# Altium PCB cyberlamp.PcbDoc (part 1 of 2)
Units mm, origin at the board's own origin, x right, y up, seen from the top; angles counter-clockwise.
Board outline 100 x 80 mm, 2 copper layers (Top Layer, Bottom Layer), stack 1.371 mm thick; 155 components, 110 nets, 527 pads, 165 vias.
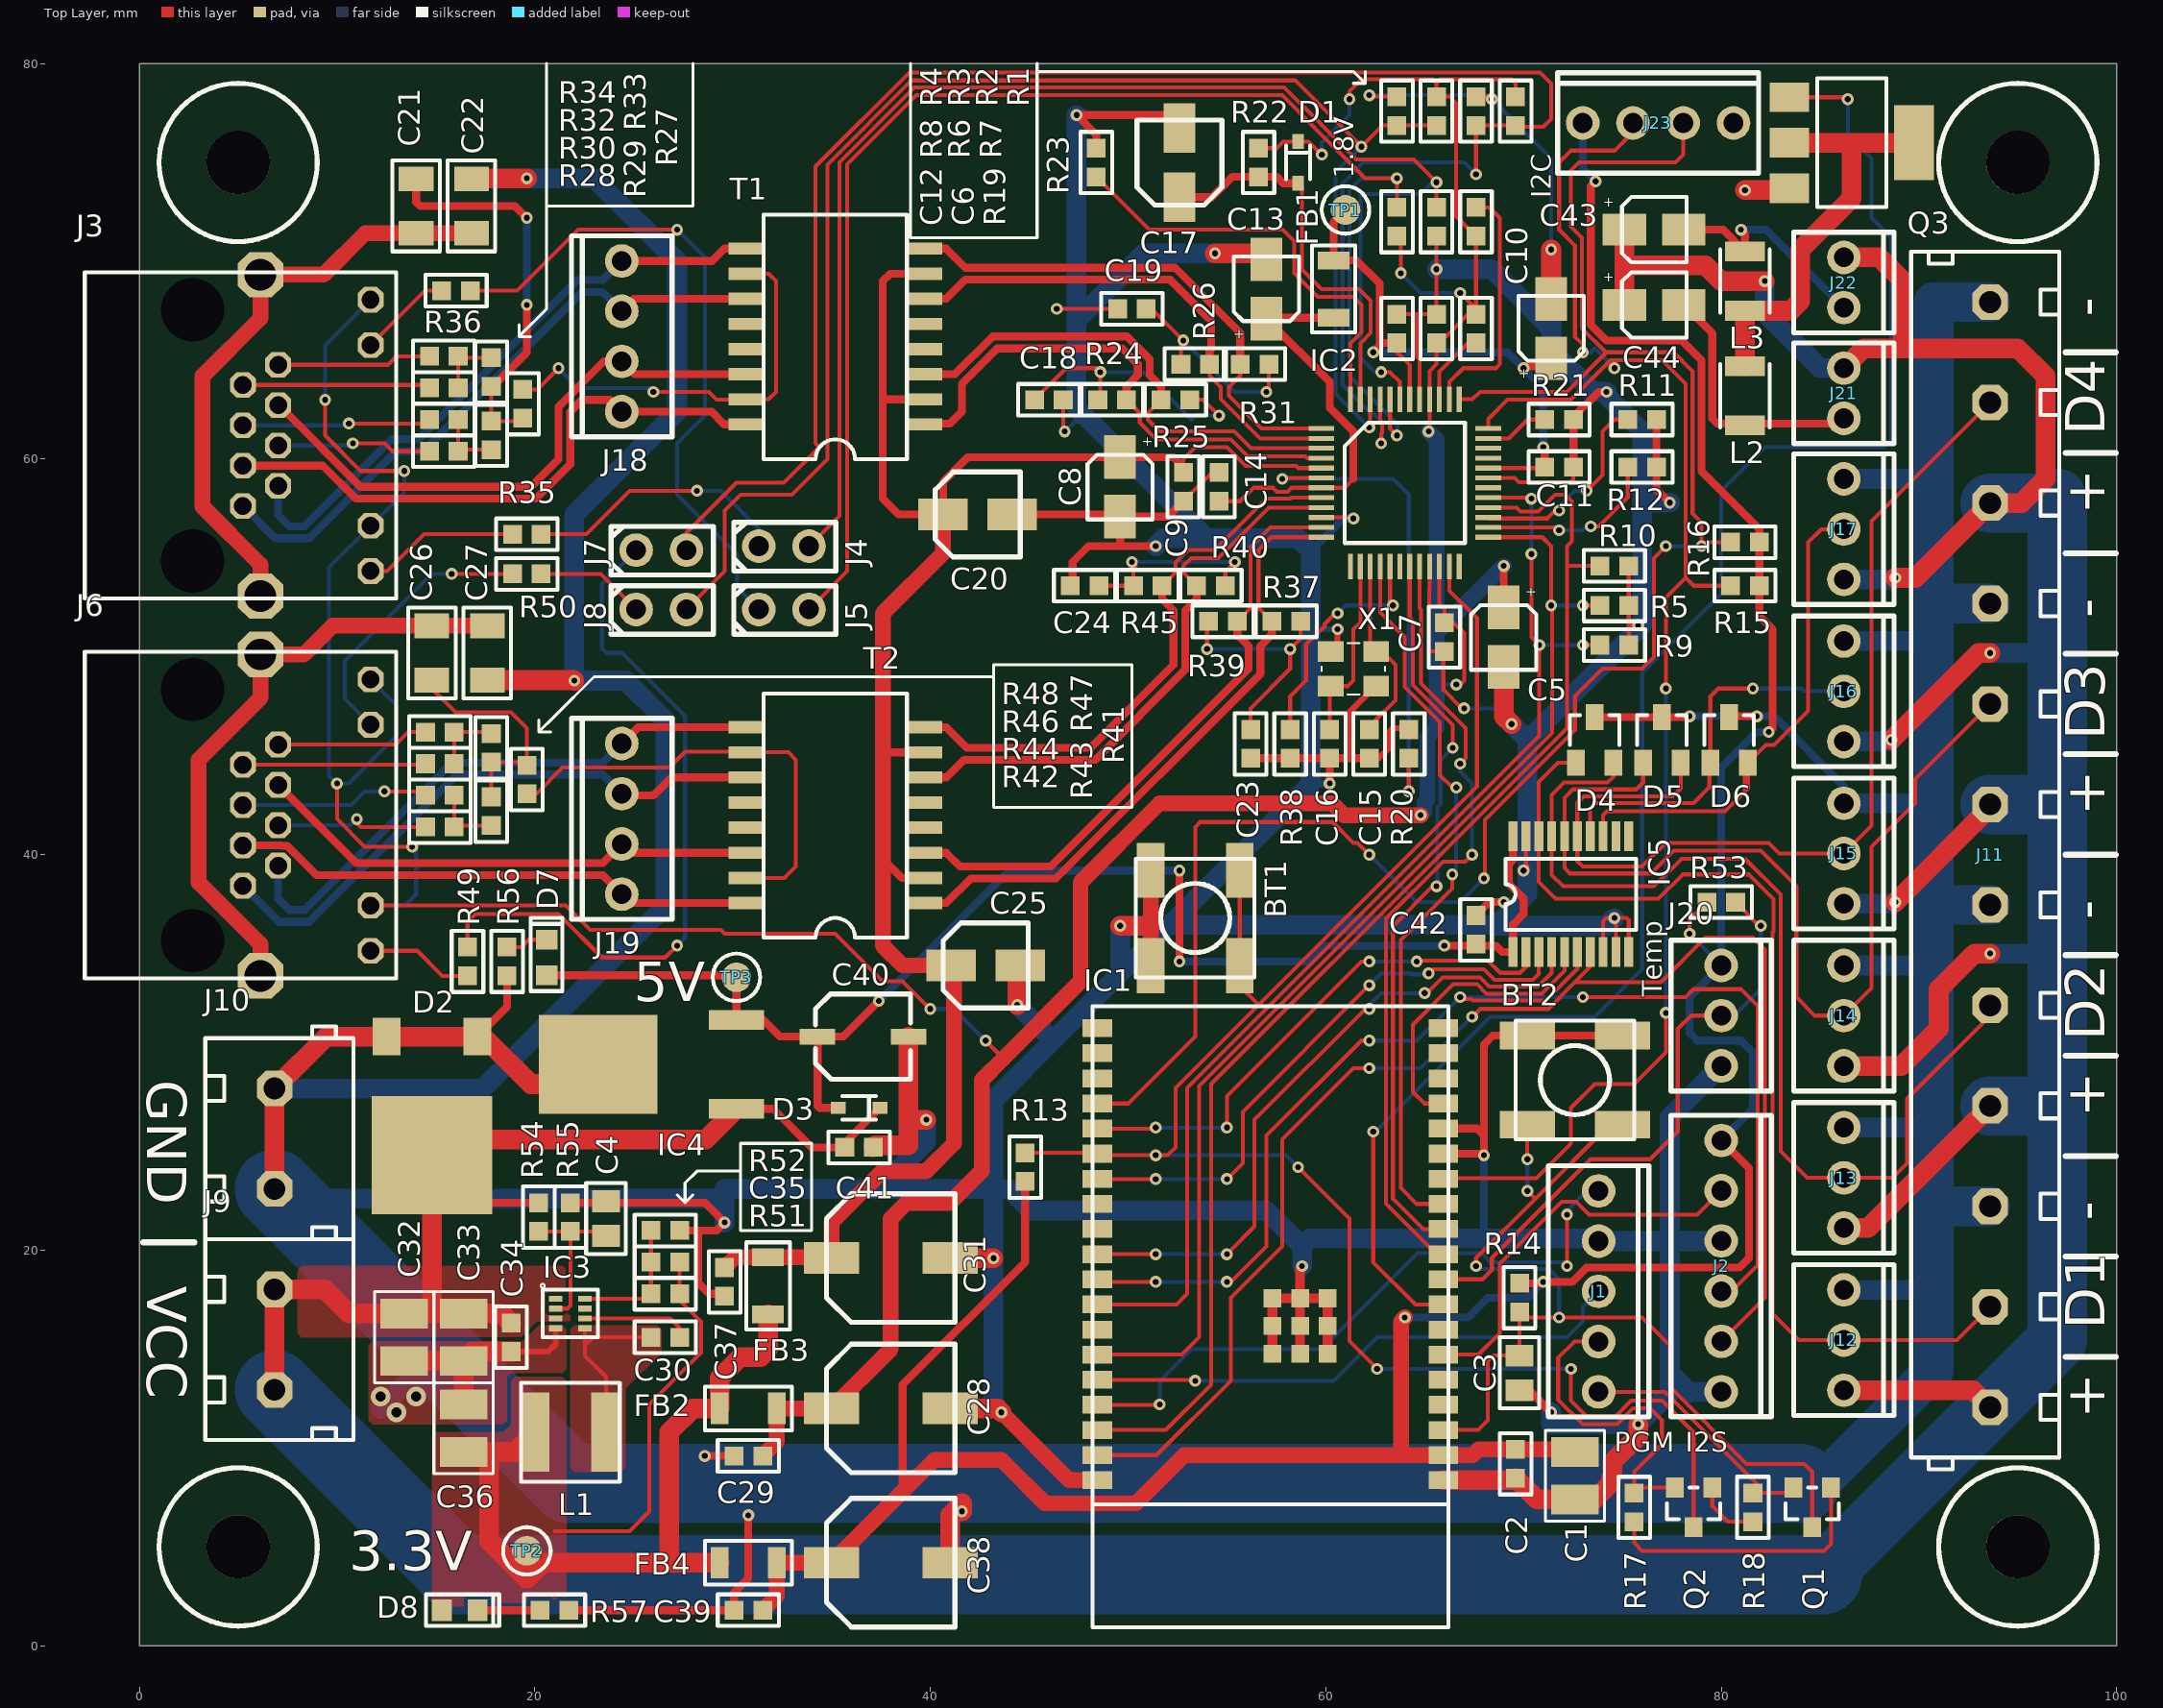
[diagram p0: Top Layer view]
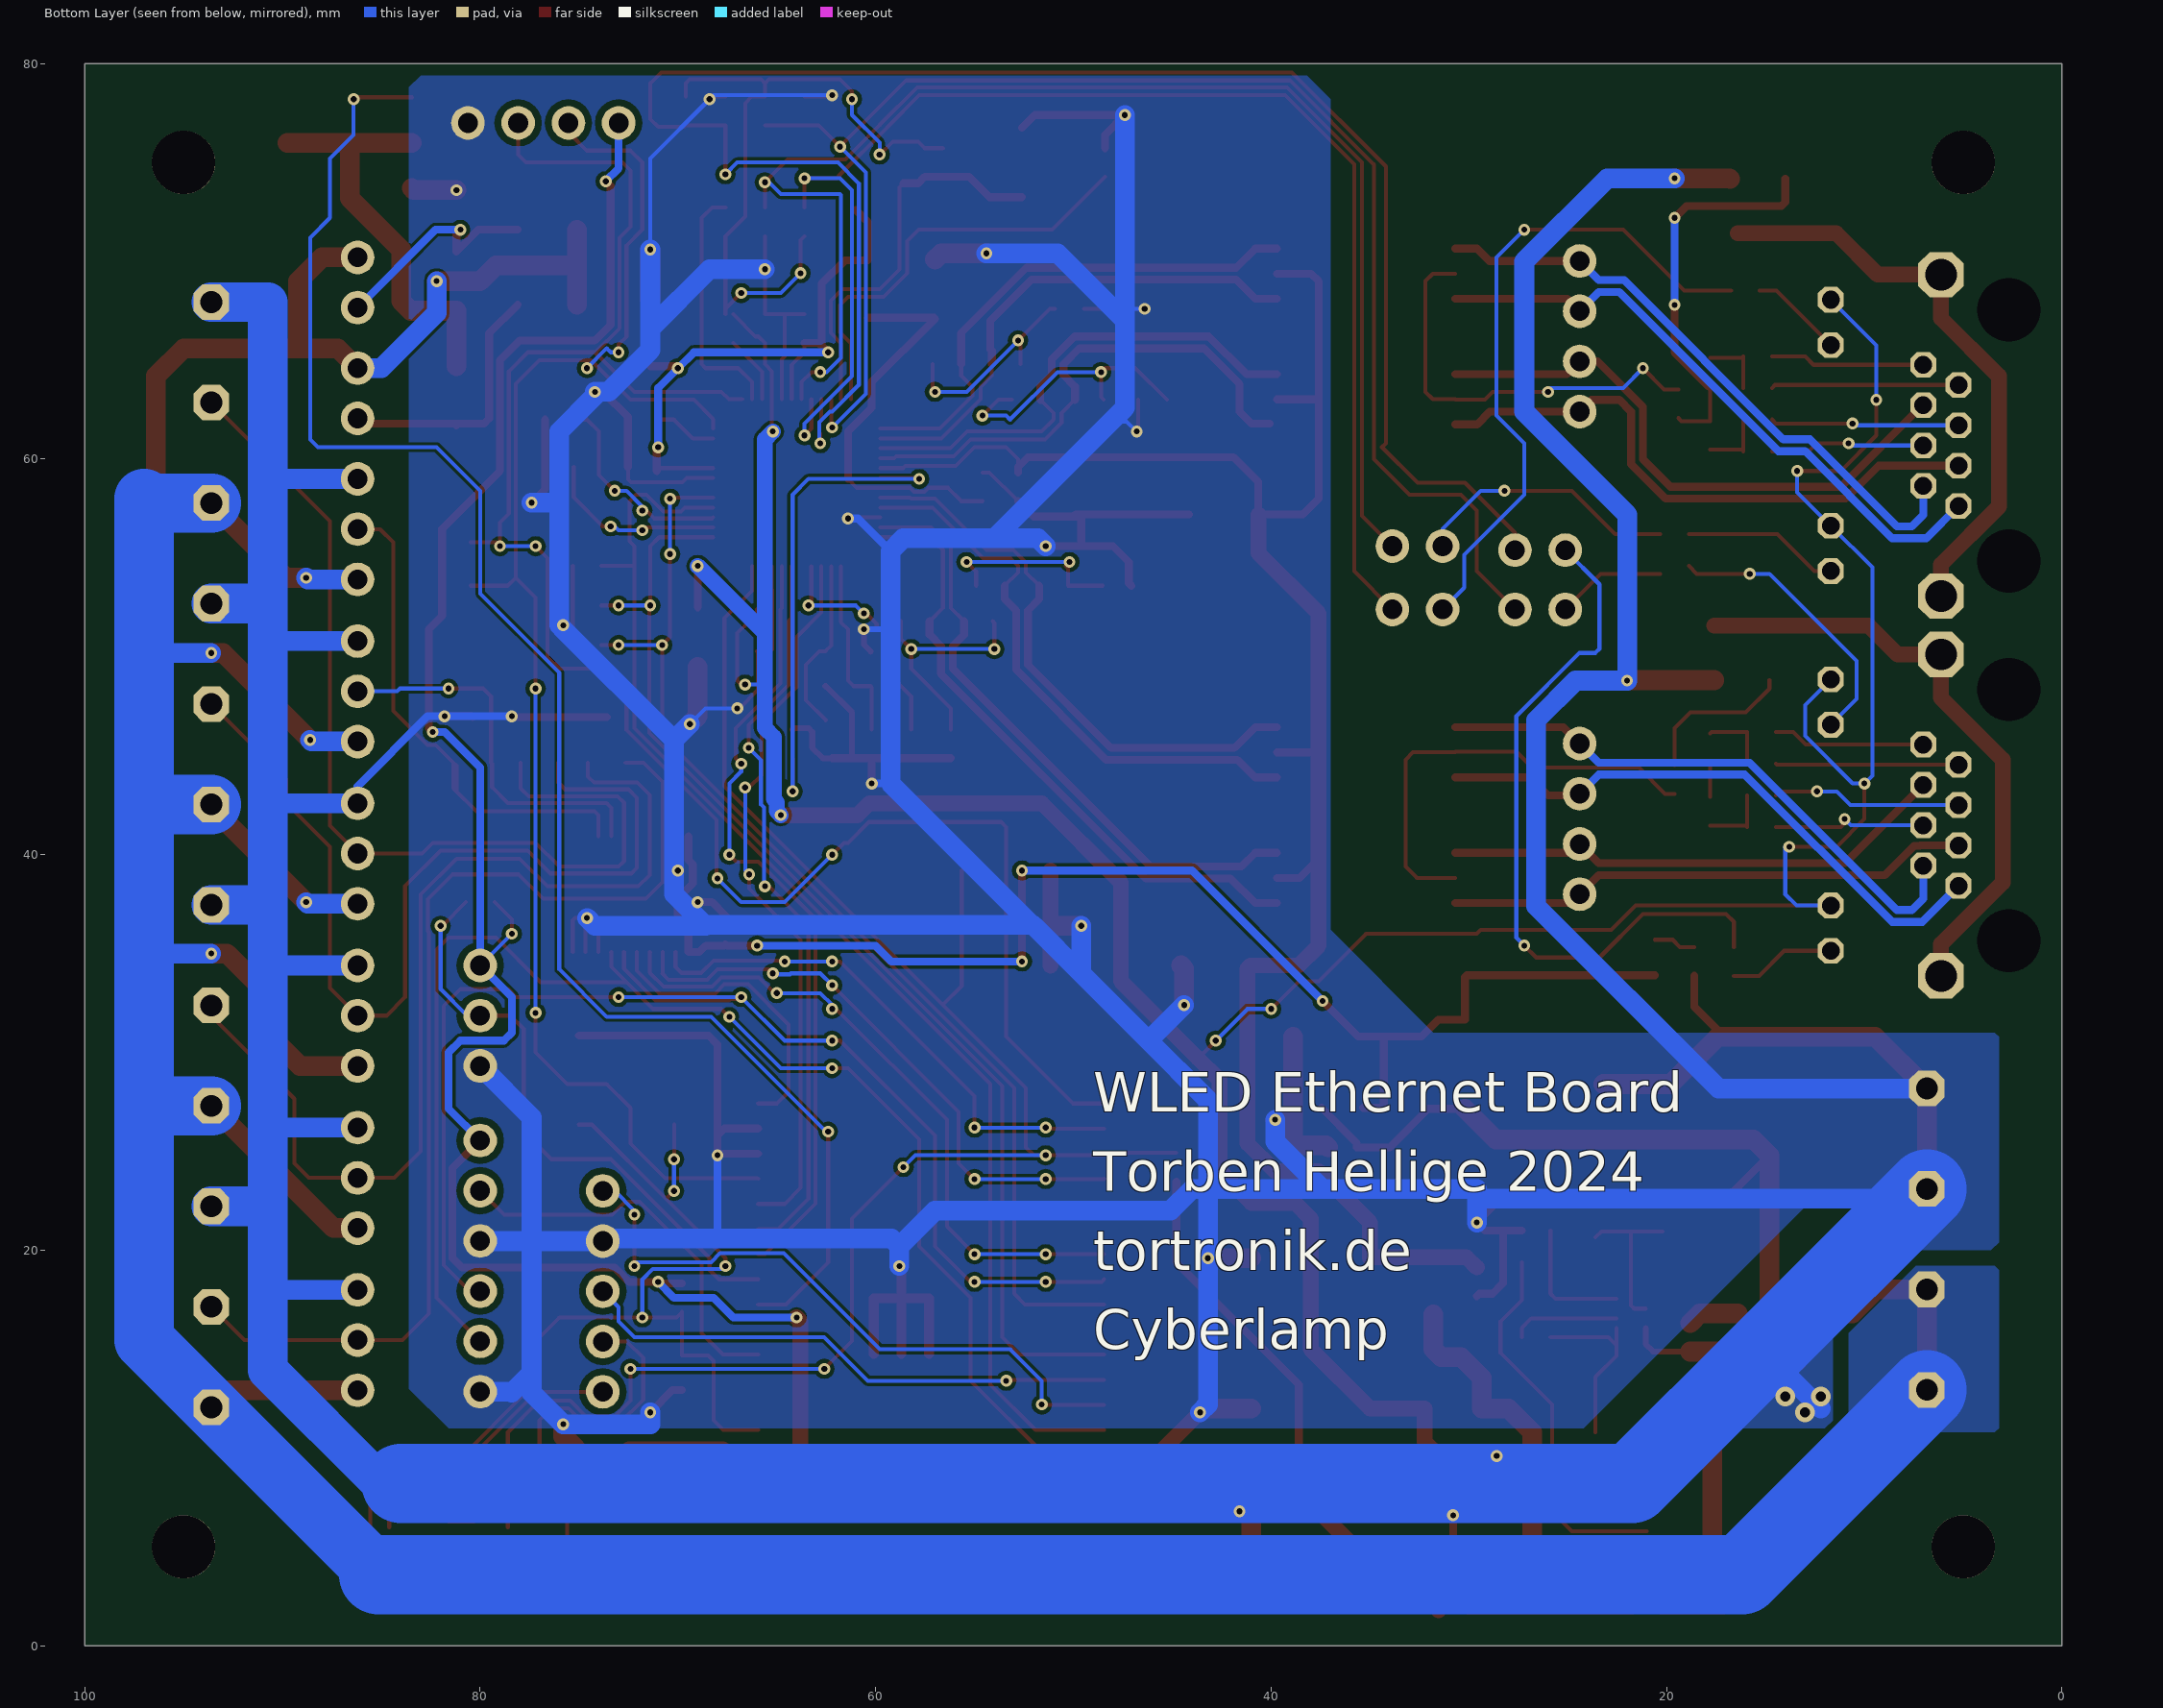
[diagram p1: Bottom Layer view, seen from below]

## Layer stack, top to bottom
Top Solder: solder mask 0.0102, Solder Resist, Dk 3.5
Top Layer: signal copper 0.0356
Dielectric 1: dielectric 1.3, FR-4, Dk 4.8
Bottom Layer: signal copper 0.0356
Bottom Solder: solder mask 0.0102, Solder Resist, Dk 3.5

## Board outline
0,0 100,0 100,80 0,80

## Design rules (kind name [scope] priority, off if disabled: settings)
Clearance [All] p1: gap=0.2 ignorepadtopadclearanceinfootprint=FALSE except(0: Arc-Hole Track-Hole SMDPad-Hole THPad-Hole Via-Hole Fill-Hole Poly-Hole Region-Hole Text-Hole; 0.15: Arc-Arc Arc-Track Arc-THPad Arc-Fill Arc-Poly Arc-Region Arc-Text Track-Track Track-THPad Track-Fill Track-Poly Track-Region Track-Text SMDPad-THPad; 0.25: Arc-Via Track-Via; 0.33: THPad-Fill THPad-Poly THPad-Region; 0.5: THPad-THPad)
DiffPairsRouting [All] p1: maxlimit=0.254 minlimit=0.2 mostfreqgap=0.2 toplayer_minwidth=0.2 toplayer_maxwidth=0.5 toplayer_prefwidth=0.4 bottomlayer_minwidth=0.2 bottomlayer_maxwidth=0.5 bottomlayer_prefwidth=0.4 maxuncoupledlength=12.7
HoleSize HoleSize_1 [All] p1: absolutevalues=TRUE maxlimit=2.54 minlimit=0.025 maxpercent=80.000 minpercent=20.000
HoleSize [IsVia] p2: absolutevalues=TRUE maxlimit=6.3 minlimit=0.3 maxpercent=80.000 minpercent=20.000
HoleToHoleClearance [All] p1: gap=0.5 allowstackedmicrovias=FALSE
MinimumAnnularRing [IsVia] p1: minimumring=0.15
MinimumSolderMaskSliver [All] p1: minsoldermaskwidth=0.01
PolygonConnect [All] p1: connectstyle=Direct reliefconductorwidth=0.254 reliefentries=4 polygonreliefangle="90 Angle" airgapwidth=0.254
RoutingVias [All] p1: holewidth=0.6 width=1 viastyle="Through Hole" minholewidth=0.3 minwidth=0.6 maxholewidth=1 maxwidth=1.3
SilkToSilkClearance [All] p1 off: silktosilkclearance=0.01
SilkToSolderMaskClearance [IsPad] p1 off: minsilkscreentomaskgap=0.01 clearancetoexposedcopper=TRUE
SolderMaskExpansion [All] p1: expansion=0.102
Width [All] p1: maxlimit=5 minlimit=0.13 preferedwidth=0.4
24 further rules are at their usual default settings.

## Classes and differential pairs
component class U_fan: C43 C44 J21 J22 L2 L3 Q3
component class esp32: BT1 BT2 C1 C2 C3 IC1 J1 J2 J20 J23 Q1 Q2 R13 R14 R15 R16 R17 R18 R53
component class U_cyberlamp: C5 C6 C7 C8 C9 C10 C11 C12 C13 C14 C15 C16 C17 C18 C19 C20 C21 C22 C23 C24 C25 C26 C27 D1 FB1 IC2 J3 J4 J5 J6 J7 J8 J18 J19 R1 R2 R3 R4 R5 R6 R7 R8 R9 R10 R11 R12 R19 R20 R21 R22 R23 R24 R25 R26 R27 R28 R29 R30 R31 R32 R33 R34 R35 R36 R37 R38 R39 R40 R41 R42 R43 R44 R45 R46 R47 R48 R49 R50 T1 T2 TP1 X1
component class U_leddriver: C42 D4 D5 D6 IC5 J11 J12 J13 J14 J15 J16 J17
component class U_powersupply: C4 C28 C29 C30 C31 C32 C33 C34 C35 C36 C37 C38 C39 C40 C41 D2 D3 D7 D8 FB2 FB3 FB4 IC3 IC4 J9 J10 L1 R51 R52 R54 R55 R56 R57 TP2 TP3
differential pair RX1: +RX1_P -RX1_N
differential pair RX2: +RX2_P -RX2_N
differential pair T_RX1: +T_RX1_P -T_RX1_N
differential pair T_RX2: +T_RX2_P -T_RX2_N
differential pair T_TX1: +T_TX1_P -T_TX1_N
differential pair T_TX2: +T_TX2_P -T_TX2_N
differential pair TX1: +TX1_P -TX1_N
differential pair TX2: +TX2_P -TX2_N

## Components (designator, comment, footprint, x,y, rotation, side; value= is the part's Value field where it differs from the comment)
BT1 "TL3301 JLead" TL3301_Jlead 53.4,36.8 r90 top
BT2 "TL3301 JLead" TL3301_Jlead 72.6,28.6 r180 top
C1 "10uF 63V X7R 1210" 1210 72.6,8.6 r270 top value=10u
C2 "100nF 50V MLCC 0603" 0603 69.6,9.2 r270 top value=100nF
C3 "1µF 25V MLCC 0805" 0805 69.8,13.8 r270 top value=1µF
C4 "1µF 25V MLCC 0805" 0805 23.6,21.6 r90 top value=1µF
C5 "Elko 22µF 6.3V WE" WCAP-ASLU 69,51 r90 top value=22µ
C6 "100nF 50V MLCC 0603" 0603 65.6,66.6 r90 top value=100nF
C7 "100nF 50V MLCC 0603" 0603 66,51 r270 top value=100nF
C8 "Elko 22µF 6.3V WE" WCAP-ASLU 49.6,58.6 r90 top value=22µ
C9 "100nF 50V MLCC 0603" 0603 52.8,58.6 r270 top value=100nF
C10 "Elko 22µF 6.3V WE" WCAP-ASLU 71.4,66.6 r270 top value=22µ
C11 "100nF 50V MLCC 0603" 0603 71.8,59.6 r0 top value=100nF
C12 "100nF 50V MLCC 0603" 0603 63.6,66.6 r90 top value=100nF
C13 "Elko 22µF 6.3V WE" WCAP-ASLU 57,68.6 r270 top value=22µ
C14 "100nF 50V MLCC 0603" 0603 54.6,58.6 r90 top value=100nF
C15 "18pF 50V MLCC 0603" 0603 62.2,45.6 r90 top value=18pF
C16 "18pF 50V MLCC 0603" 0603 60.2,45.6 r90 top value=18pF
C17 "Elko_10uF_16V_PanasonicB" PANASONIC_B 52.6,75 r0 top value=10µ
C18 "100nF 50V MLCC 0603" 0603 46,63 r0 top value=100nF
C19 "100nF 50V MLCC 0603" 0603 50.2,67.6 r180 top value=100nF
C20 "Elko_10uF_16V_PanasonicB" PANASONIC_B 42.4,57.2 r270 top value=10µ
C21 "NP0" 1206#1 14,72.8 r90 top value=1000nF
C22 "NP0" 1206#1 16.8,72.8 r270 top value=1000nF
C23 "100nF 50V MLCC 0603" 0603 56.2,45.6 r270 top value=100nF
C24 "100nF 50V MLCC 0603" 0603 47.8,53.6 r180 top value=100nF
C25 "Elko_10uF_16V_PanasonicB" PANASONIC_B 42.8,34.4 r270 top value=10µ
C26 "NP0" 1206#1 14.8,50.2 r270 top value=1000nF
C27 "NP0" 1206#1 17.6,50.2 r90 top value=1000nF
C28 "Elko_100uF_16V_PanasonicC" PANASONIC_C 38,12 r270 top value=100µ
C29 "100nF 50V MLCC 0603" 0603 30.8,9.6 r180 top value=100nF
C30 "100nF 50V MLCC 0603" 0603 26.6,15.6 r180 top value=100nF
C31 "Elko_100uF_16V_PanasonicC" PANASONIC_C 38,19.6 r270 top value=100µ
C32 "22uF 35V X5R 1210" 1210 13.4,15.6 r270 top value=22u
C33 "22uF 35V X5R 1210" 1210 16.4,15.6 r270 top value=22u
C34 "100nF 50V MLCC 0603" 0603 18.8,15.6 r270 top value=100nF
C35 "47pF MLCC 0603" 0603 26.6,19.4 r180 top value=47p
C36 "47uF 16V X7R 1210" 1210 16.4,11 r90 top value=47u
C37 "100nF 50V MLCC 0603" 0603 29.6,18.4 r270 top value=100nF
C38 "Elko_100uF_16V_PanasonicC" PANASONIC_C 38,4.2 r270 top value=100µ
C39 "100nF 50V MLCC 0603" 0603 30.8,1.8 r180 top value=100nF
C40 "2,2µF 50V Size B Elko" SIZE_B 36.6,30.8 r270 top
C41 "100nF 50V MLCC 0603" 0603 36.4,25.2 r180 top value=100nF
C42 "100nF 50V MLCC 0603" 0603 67.6,36.2 r90 top value=100nF
C43 "Elko 22µF 6.3V WE" WCAP-ASLU 76.6,71.6 r180 top value=22µ
C44 "Elko 22µF 6.3V WE" WCAP-ASLU 76.6,67.8 r180 top value=22µ
D1 "1N4148WS" SOD323 58.6,75 r270 top
D2 "V20PWM12H" TO-252AE 14.8,24.8 r180 top
D3 "1N4148WS" SOD323 36.4,27.2 r180 top
D4 "CDSOT23-SM712" SOT23 73.6,45.8 r180 top
D5 "CDSOT23-SM712" SOT23 77,45.8 r180 top
D6 "CDSOT23-SM712" SOT23 80.4,45.8 r180 top
D7 "GN" G0805 20.6,34.8 r270 top
D8 "GN" G0805 16.2,1.8 r180 top
FB1 "HI1206N101R-10" 1206#2 60.4,68.6 r270 top
FB2 "HI1206N101R-10" 1206#2 30.8,12 r0 top
FB3 "HI1206N101R-10" 1206#2 31.8,18.2 r90 top
FB4 "HI1206N101R-10" 1206#2 30.8,4.2 r0 top
IC1 "ESP32-WROVER-E" ESP32-WROVER-I 57.2,19.8 r180 top
IC2 "KSZ8863RLL" LQFP48 64,58.8 r0 top
IC3 "TPS62933F" SOT583-8 21.8,16.8 r0 top
IC4 "LF 50 CDT" D-PAK 30.2,29.4 r90 top
IC5 "74AHCT245" TSSOP20 72.4,38 r90 top
J1 "PSS 254/5G" "PSS 5pol" 73.8,23 r270 top
J2 "PSS 254/6G" "PSS 6pol" 80,19.2 r270 top
J3 "RJ45" MTJ-88ARX1-FSM-PG-LH 7.2,61.2 r270 top
J4 "SL 1X2G 2,54" "SL_1x2 2.54mm" 32.6,55.6 r0 top
J5 "SL 1X2G 2,54" "SL_1x2 2.54mm" 32.6,52.4 r0 top
J6 "RJ45" MTJ-88ARX1-FSM-PG-LH 7.2,42 r270 top
J7 "SL 1X2G 2,54" "SL_1x2 2.54mm" 26.4,55.4 r0 top
J8 "SL 1X2G 2,54" "SL_1x2 2.54mm" 26.4,52.4 r0 top
J9 "AKZ500" AKZ500/2 6.84,15.48 r270 top
J10 "AKZ500" AKZ500/2 6.84,25.64 r270 top
J11 "AKZ500" AKZ500/12 93.6,40 r90 top
J12 "PSS 254/3G" "PSS 3pol" 86.2,18 r270 top
J13 "PSS 254/3G" "PSS 3pol" 86.2,26.2 r270 top
J14 "PSS 254/3G" "PSS 3pol" 86.2,34.4 r270 top
J15 "PSS 254/3G" "PSS 3pol" 86.2,42.6 r270 top
J16 "PSS 254/3G" "PSS 3pol" 86.2,50.8 r270 top
J17 "PSS 254/3G" "PSS 3pol" 86.2,59 r270 top
J18 "PSS 254/4G" "PSS 4pol" 24.4,62.4 r90 top
J19 "PSS 254/4G" "PSS 4pol" 24.4,38 r90 top
J20 "PSS 254/3G" "PSS 3pol" 80,34.4 r270 top
J21 "PSS 254/2G" "PSS 2pol" 86.2,64.6 r270 top
J22 "PSS 254/2G" "PSS 2pol" 86.2,70.2 r270 top
J23 "PSS 254/4G" "PSS 4pol" 73,77 r0 top
L1 "SRN5040-8R2M" "BOURNS SRN5040" 21.8,10.8 r180 top value=8.2uH
L2 "TDL_NL322522" NL322522 81.2,63.2 r270 top value=22uH
L3 "TDL_NL322522" NL322522 81.2,69 r90 top value=22uH
Q1 "FMMT 617" SOT-23 84.6,7 r180 top
Q2 "FMMT 617" SOT-23 78.6,7 r180 top
Q3 "BUK98180" SOT223 86.6,76 r270 top
R1 "1k 100mW 0603" res0603 69.6,77.6 r90 top value=1k
R2 "1k 100mW 0603" res0603 67.6,77.6 r270 top value=1k
R3 "1k 100mW 0603" res0603 65.6,77.6 r90 top value=1k
R4 "1k 100mW 0603" res0603 63.6,77.6 r270 top value=1k
R5 "1k 100mW 0603" res0603 74.6,52.6 r180 top value=1k
R6 "1k 100mW 0603" res0603 65.6,72 r90 top value=1k
R7 "4k7 100mW 0603" res0603 67.6,72 r90 top value=4k7
R8 "4k7 100mW 0603" res0603 63.6,72 r90 top value=4k7
R9 "1k 100mW 0603" res0603 74.6,50.6 r180 top value=1k
R10 "1k 100mW 0603" res0603 74.6,54.6 r180 top value=1k
R11 "1k 100mW 0603" res0603 76,62 r180 top value=1k
R12 "1k 100mW 0603" res0603 76,59.6 r180 top value=1k
R13 "4k7 100mW 0603" res0603 44.8,24.2 r270 top value=4k7
R14 "10K 100mW 0603" res0603 69.8,17.6 r90 top value=10K
R15 "4k7 100mW 0603" res0603 81.2,53.6 r0 top value=4k7
R16 "4k7 100mW 0603" res0603 81.2,55.8 r0 top value=4k7
R17 "10K 100mW 0603" res0603 75.6,7 r90 top value=10K
R18 "10K 100mW 0603" res0603 81.6,7 r90 top value=10K
R19 "4k7 100mW 0603" res0603 67.6,66.6 r270 top value=4k7
R20 "11k8 100mW 0603" res0603 64.2,45.6 r270 top value=11k8
R21 "1k 100mW 0603" res0603 71.8,62 r180 top value=1k
R22 "10K 100mW 0603" res0603 56.6,75 r90 top value=10K
R23 "1k 100mW 0603" res0603 48.4,75 r90 top value=1k
R24 "51R 100mW 0603" res0603 49.2,63 r0 top value=51
R25 "51R 100mW 0603" res0603 52.4,63 r180 top value=51
R26 "51R 100mW 0603" res0603 53.4,64.8 r0 top value=51
R27 "75R 100mW 0603" res0603 19.4,62.8 r270 top value=75
R28 "51R 100mW 0603" res0603 15.4,60.4 r180 top value=51
R29 "51R 100mW 0603" res0603 17.8,61.2 r270 top value=51
R30 "51R 100mW 0603" res0603 15.4,62 r180 top value=51
R31 "51R 100mW 0603" res0603 56.4,64.8 r180 top value=51
R32 "51R 100mW 0603" res0603 15.4,63.6 r180 top value=51
R33 "51R 100mW 0603" res0603 17.8,64.4 r90 top value=51
R34 "51R 100mW 0603" res0603 15.4,65.2 r180 top value=51
R35 "220R 100mW 0603" res0603 19.6,56.2 r180 top value=220R
R36 "220R 100mW 0603" res0603 16.022,68.52 r180 top value=220R
R37 "51R 100mW 0603" res0603 58,51.8 r180 top value=51
R38 "1k 100mW 0603" res0603 58.2,45.6 r270 top value=1k
R39 "51R 100mW 0603" res0603 54.8,51.8 r0 top value=51
R40 "51R 100mW 0603" res0603 54.2,53.6 r180 top value=51
R41 "75R 100mW 0603" res0603 19.6,43.8 r90 top value=75
R42 "51R 100mW 0603" res0603 15.2,41.4 r180 top value=51
R43 "51R 100mW 0603" res0603 17.8,42.2 r270 top value=51
R44 "51R 100mW 0603" res0603 15.2,43 r180 top value=51
R45 "51R 100mW 0603" res0603 51,53.6 r0 top value=51
R46 "51R 100mW 0603" res0603 15.2,44.6 r180 top value=51
R47 "51R 100mW 0603" res0603 17.8,45.4 r90 top value=51
R48 "51R 100mW 0603" res0603 15.2,46.2 r180 top value=51
R49 "220R 100mW 0603" res0603 16.6,34.6 r270 top value=220R
R50 "220R 100mW 0603" res0603 19.6,54.2 r180 top value=220R
R51 "30k9 100mW 0603" res0603 26.6,17.8 r0 top value=30.9k
R52 "10K 100mW 0603" res0603 26.6,21 r180 top value=10K
R53 "4k7 100mW 0603" res0603 80,37.6 r180 top value=4k7
R54 "4k7 100mW 0603" res0603 20.2,21.675 r90 top value=4k7
R55 "4k7 100mW 0603" res0603 21.8,21.675 r270 top value=4k7
R56 "4k7 100mW 0603" res0603 18.6,34.6 r90 top value=4k7
R57 "2k7 100mW 0603" res0603 21,1.8 r180 top value=2k7
T1 "S558-5999-U7-F" S558-5999-U7-F 35.2,66.2 r90 top
T2 "S558-5999-U7-F" S558-5999-U7-F 35.2,42 r90 top
TP1 "testpoint" testpoint 61,72.6 r0 top
TP2 "testpoint" testpoint 19.6,4.8 r0 top
TP3 "testpoint" testpoint 30.2,33.8 r0 top
X1 "25MHz" ABM8 61.4,49.4 r180 top

## Footprints (in the part's own frame and the unit in brackets; to place one, negate y for a bottom-side part, rotate by r counter-clockwise, add the part's x,y. Pads: shape width x height; smd on the part's side, far side on the other; paste and mask are expansions set on the pad)
0603 [mm]
  rect 0.95x0.95 smd paste-0.1: 1(-0.725,0) 2(0.725,0)
  silkscreen extent -1.55,-0.8 1.55,0.8, body extent -0.8,-0.4 0.8,0.4, height 0.3
0805 [mm]
  rect 1.1x1.4 smd paste-0.1: 1(-0.875,0) 2(0.875,0)
  silkscreen extent -1.8,-1 1.8,1, body extent -0.97,-0.62 1.03,0.62, height 0.78
1206#1 [mm]
  rect 1.25x1.75 smd: 1(-1.375,0) 2(1.375,0)
  silkscreen extent -2.3,-1.2 2.3,1.2, body extent -1.65,-0.78 1.55,0.83, height 1
1206#2 [mm]
  rect 0.9x1.6 smd: 1(-1.45,0) 2(1.45,0)
  silkscreen extent -2.2,-1.1 2.2,1.1
1210 [mm]
  rect 1.5x2.4 smd: 1(-1.2,0) 2(1.2,0)
  silkscreen extent -2.3,-1.5 2.3,1.5, body extent -1.8,-1.3 1.6,1.3, height 1.5
ABM8 [mm]
  rect 1.3x1.05 smd: 1(-1.15,-0.875) 2(1.15,-0.875) 3(1.15,0.875) 4(-1.15,0.875)
  silkscreen extent -1.6,-1.3 1.6,1.3, body extent -1.6,-1.25 1.6,1.25, height 0.8
AKZ500/2 [mm]
  oct 1.8x1.8 hole 1.1: 1(-2.54,0) 2(2.54,0)
  silkscreen extent -5.68,-3.5 5.08,4, body extent -5.08,-3.75 5.08,3.75, height 10
AKZ500/12 [mm]
  oct 1.8x1.8 hole 1.1: 1(-27.94,0) 2(-22.86,0) 3(-17.78,0) 4(-12.7,0) 5(-7.62,0) 6(-2.54,0) 7(2.54,0) 8(7.62,0) 9(12.7,0) 10(17.78,0) 11(22.86,0) 12(27.94,0)
  silkscreen extent -31.08,-3.5 30.48,4, body extent -30.48,-3.75 30.48,3.75, height 10
"BOURNS SRN5040" [mm]
  rect 1.5x4 smd: 1(-1.8,0) 2(1.8,0)
  silkscreen extent -2.5,-2.5 2.5,2.5, body extent -2.5,-2.51 2.5,2.51, height 3.5
D-PAK [mm]
  rect 1x2.8 smd: 1(-2.25,0) 2(2.25,0)
  rect 5x6 smd: 3(0,7)
  body extent -3.25,-0.9 3.25,8.8, height 2.3
ESP32-WROVER-I [mm]
  rect 1.5x0.9 smd: 1(-8.75,11.43) 2(-8.75,10.16) 3(-8.75,8.89) 4(-8.75,7.62) 5(-8.75,6.35) 6(-8.75,5.08) 7(-8.75,3.81) 8(-8.75,2.54) 9(-8.75,1.27) 10(-8.75,0) 11(-8.75,-1.27) 12(-8.75,-2.54) 13(-8.75,-3.81) 14(-8.75,-5.08) 15(-8.75,-6.35) 16(-8.75,-7.62) 17(-8.75,-8.89) 18(-8.75,-10.16) 19(-8.75,-11.43) 20(8.75,-11.43) 21(8.75,-10.16) 22(8.75,-8.89) 23(8.75,-7.62) 24(8.75,-6.35) 25(8.75,-5.08) 26(8.75,-3.81) 27(8.75,-2.54) 28(8.75,-1.27) 29(8.75,0) 30(8.75,1.27) 31(8.75,2.54) 32(8.75,3.81) 33(8.75,5.08) 34(8.75,6.35) 35(8.75,7.62) 36(8.75,8.89) 37(8.75,10.16) 38(8.75,11.43)
  rect 0.9x0.9 smd: 39(-2.9,5.03) 39(-2.9,2.23) 39(-2.9,3.63) 39(-1.5,5.03) 39(-1.5,2.23) 39(-1.5,3.63) 39(-0.1,5.03) 39(-0.1,3.63) 39(-0.1,2.23)
  silkscreen extent -9,-12.53 9,18.87, body extent -9,-12.5 9,18.9, height 3.45
G0805 [mm] "LED"
  rect 1x1.1 smd: 1(-0.9,0) 2(0.9,0)
  silkscreen extent -2,-0.8 1.7,0.8, body extent -1.01,-0.62 1.01,0.63, height 1.1
LQFP48 [mm]
  rect 1.3x0.25 smd: 1(-4.225,2.75) 2(-4.225,2.25) 3(-4.225,1.75) 4(-4.225,1.25) 5(-4.225,0.75) 6(-4.225,0.25) 7(-4.225,-0.25) 8(-4.225,-0.75) 9(-4.225,-1.25) 10(-4.225,-1.75) 11(-4.225,-2.25) 12(-4.225,-2.75) 25(4.225,-2.75) 26(4.225,-2.25) 27(4.225,-1.75) 28(4.225,-1.25) 29(4.225,-0.75) 30(4.225,-0.25) 31(4.225,0.25) 32(4.225,0.75) 33(4.225,1.25) 34(4.225,1.75) 35(4.225,2.25) 36(4.225,2.75)
  rect 0.25x1.3 smd: 13(-2.75,-4.225) 14(-2.25,-4.225) 15(-1.75,-4.225) 16(-1.25,-4.225) 17(-0.75,-4.225) 18(-0.25,-4.225) 19(0.25,-4.225) 20(0.75,-4.225) 21(1.25,-4.225) 22(1.75,-4.225) 23(2.25,-4.225) 24(2.75,-4.225) 37(2.75,4.225) 38(2.25,4.225) 39(1.75,4.225) 40(1.25,4.225) 41(0.75,4.225) 42(0.25,4.225) 43(-0.25,4.225) 44(-0.75,4.225) 45(-1.25,4.225) 46(-1.75,4.225) 47(-2.25,4.225) 48(-2.75,4.225)
  silkscreen extent -3.04,-3.04 3.04,3.04, body extent -4.5,-4.5 4.5,4.5, height 1.6
MTJ-88ARX1-FSM-PG-LH [mm]
  rect 0.62x1.8 hole 3.2: 0(-6.35,-4.5) 0(6.35,-4.5)
  oct 1.3x1.3 hole 0.9: 1(3.57,-1.96) 2(2.55,-0.18) 3(1.53,-1.96) 4(0.51,-0.18) 5(-0.51,-1.96) 6(-1.53,-0.18) 7(-2.55,-1.96) 8(-3.57,-0.18) 9(6.86,4.5) 10(4.57,4.5) 11(-4.57,4.5) 12(-6.86,4.5)
  oct 2.3x2.3 hole 1.6: 13(-8.125,-1.07) 13(8.125,-1.07)
  silkscreen extent -8.25,-9.96 8.25,5.79, body extent -8.42,-10.55 8.42,6.03, height 14.51
NL322522 [mm]
  rect 1x2 smd: 1(-1.5,0) 2(1.5,0)
  silkscreen extent -1.6,-1.25 1.6,1.25
PANASONIC_B [mm]
  rect 1.6x2.5 smd: +(0,-1.75) -(0,1.75)
  silkscreen extent -2.15,-2.15 2.15,2.15, body extent -2.15,-2.5 2.15,2.5, height 5.8
PANASONIC_C [mm]
  rect 1.6x2.8 smd: +(0,-3) -(0,3)
  silkscreen extent -3.25,-3.25 3.25,3.25, body extent -3.3,-3.65 3.3,3.65, height 6
"PSS 2pol" [mm] "2pol Wire-Board-Connector"
  round 1.7 hole 1: 1(0,0) 2(2.54,0)
  silkscreen extent -1.27,-2.54 3.81,2.54
"PSS 3pol" [mm] "3pol Wire-Board-Connector"
  round 1.7 hole 1: 1(0,0) 2(2.54,0) 3(5.08,0)
  silkscreen extent -1.27,-2.54 6.35,2.54, body extent -1.27,-2.9 6.35,2.9, height 11.4
"PSS 4pol" [mm] "4pol Wire-Board-Connector"
  round 1.7 hole 1: 1(0,0) 2(2.54,0) 3(5.08,0) 4(7.62,0)
  silkscreen extent -1.27,-2.54 8.89,2.54
"PSS 5pol" [mm] "5pol Wire-Board-Connector"
  round 1.7 hole 1: 1(0,0) 2(2.54,0) 3(5.08,0) 4(7.62,0) 5(10.16,0)
  silkscreen extent -1.27,-2.54 11.43,2.54
"PSS 6pol" [mm] "6pol Wire-Board-Connector"
  round 1.7 hole 1: 1(-6.35,0) 2(-3.81,0) 3(-1.27,0) 4(1.27,0) 5(3.81,0) 6(6.35,0)
  silkscreen extent -7.62,-2.54 7.62,2.54
res0603 [mm]
  rect 0.95x0.95 smd paste-0.1: 1(-0.725,0) 2(0.725,0)
  silkscreen extent -1.55,-0.8 1.55,0.8, body extent -0.83,-0.44 0.77,0.36, height 0.45
S558-5999-U7-F [mm]
  rect 0.62x1.8 smd: 1(-4.445,-4.51) 2(-3.175,-4.51) 3(-1.905,-4.51) 4(-0.635,-4.51) 5(0.635,-4.51) 6(1.905,-4.51) 7(3.175,-4.51) 8(4.445,-4.51) 9(4.445,4.51) 10(3.175,4.51) 11(1.905,4.51) 12(0.635,4.51) 13(-0.635,4.51) 14(-1.905,4.51) 15(-3.175,4.51) 16(-4.445,4.51)
  silkscreen extent -6.2,-3.62 6.15,3.62, body extent -6.16,-4.62 6.16,4.62, height 5.71
SIZE_B [mm]
  rect 0.8x1.8 smd: 1(0,-2.3) 2(0,2.3)
  silkscreen extent -2.15,-2.4 2.15,2.4, body extent -2.15,-2.5 2.15,2.5, height 5.8
"SL_1x2 2.54mm" [mm]
  round 1.7 hole 1: 1(-1.27,0) 2(1.27,0)
  silkscreen extent -2.54,-1.26 2.63,1.2, body extent -2.54,-1.25 2.54,1.25, height 8.5
SOD323 [mm]
  rect 0.75x0.6 smd: 1(-1.055,0) 2(1.055,0)
  silkscreen extent -0.85,-0.6 0.85,0.6, body extent -1.25,-0.62 1.25,0.63, height 0.9
SOT23 [mm]
  rect 0.9x1.3 smd: 1(0.95,1.15) 2(-0.95,1.15) 3(0,-1.15)
  silkscreen extent -1.25,-1.25 1.25,0.25, body extent -1.47,-1.24 1.48,1.24, height 1
SOT223 [mm]
  rect 1.5x2 smd: 1(-2.3,-3.15) 2(0,-3.15) 3(2.3,-3.15)
  rect 3.8x2 smd: 2(0,3.15)
  silkscreen extent -3.25,-1.75 3.25,1.75, body extent -3.26,-3.4 3.4,3.6, height 1.74
SOT583-8 [mm]
  rect 0.67x0.3 smd: 1(-0.74,0.75) 2(-0.74,0.25) 3(-0.74,-0.25) 4(-0.74,-0.75) 5(0.74,-0.75) 6(0.74,-0.25) 7(0.74,0.25) 8(0.74,0.75)
  silkscreen extent -1.5,-1.2 1.4,1.5
SOT-23 [mm]
  rect 0.9x1 smd: 1(-0.95,-1) 2(0.95,-1) 3(0,1)
  silkscreen extent -1.35,-1 1.35,0.6, body extent -1.5,-1.42 1.5,1.42, height 1.2
testpoint [mm]
  round 1.5 smd: 1(0,0)
  silkscreen extent -1.2,-1.2 1.2,1.2
TL3301_Jlead [mm]
  rect 2.785x1.4 smd: 1(-2.407,-2.25) 2(2.408,-2.25) 3(-2.407,2.25) 4(2.408,2.25)
  silkscreen extent -3,-3 3,3, body extent -3.8,-3 3.8,3, height 9.5
TO-252AE [mm]
  rect 6.1x5.97 smd: 1(0,0)
  rect 1.4x1.9 smd: 2(-2.29,-6) 2(2.29,-6)
TSSOP20 [mm]
  rect 1.5x0.45 smd: 1(-2.925,2.925) 2(-2.925,2.275) 3(-2.925,1.625) 4(-2.925,0.975) 5(-2.925,0.325) 6(-2.925,-0.325) 7(-2.925,-0.975) 8(-2.925,-1.625) 9(-2.925,-2.275) 10(-2.925,-2.925) 11(2.925,-2.925) 12(2.925,-2.275) 13(2.925,-1.625) 14(2.925,-0.975) 15(2.925,-0.325) 16(2.925,0.325) 17(2.925,0.975) 18(2.925,1.625) 19(2.925,2.275) 20(2.925,2.925)
  silkscreen extent -1.8,-3.3 1.8,3.3, body extent -3.2,-3.25 3.2,3.25, height 1.13
WCAP-ASLU [mm]
  rect 2.2x1.6 smd: +(1.5,0) -(-1.5,0)
  silkscreen extent -1.65,-1.65 1.62,1.65, body extent -1.9,-1.65 1.9,1.65, height 5.35

## Part data
BT1 BT2: library part TK3301_jlead, "TL3301 J-Lead button"
C1: lcsc code=C703129, voltage=63V, mouser part=81-GRM32ER71J106MA2L
C2 C6 C7 C9 C11 C12 C14 C18 C19 C23 C24 C29 C30 C34 C37 C39 C41 C42: dielectricum=X7R, lcsc code=C2252264, voltage=50V, mouser code=80-C0603X104K3R, reichelt code="X7R-G0603 100N", storage="AIDTEKBox [] Röhrchen", storageID="18 [] F7"
C3 C4: dielectricum=X5R, lcsc code=C35795, voltage=25V, reichelt code="KEM X5R0805 1,0U"
C5 C8 C10 C13 C43 C44: voltage=6.3V, mouser code=710-865090168010
C15 C16: dielectricum=C0G, voltage=50V, mouser code=603-CC0603JRNPABN180
C17 C20 C25 C28 C31 C38: voltage=16V
  C17 C20 C25: mouser code=EEEHB1C100R
  C28 C31 C38: mouser code=667-16SVPC100M
C21 C22 C26 C27: library part "1000nF 2kV X7R 1206", "1000nF 2kV X7R 1206", voltage=2kV, mouser code=710-885342208024
C32 C33: voltage=35V, mouser part=963-GMK325BJ226MM-P
C35: "680pF 50V MLCC 0603", dielectricum=NPO, lcsc code=C94904
C36: lcsc code=C77101, voltage=16V, mouser part=GRM32ER61C476KE15L
C40: capacitance=2,2µF, voltage=50V, reichelt code="VF 2,2/50 C-B"
D1 D3: "Small signal diode", mouser code=512-1N4148WS
D2: library part V20PWM12HM3, "20A high power diode", mouser code=78-V20PWM12HM3/I
D4 D5 D6: "Dual TVS diode", mouser code=652-CDSOT23-SM712
D7 D8: library part "G0805 LED GN", If=20mA, reichelt code="SMD-LED 0805 GN", Vf=2.2V
FB1 FB2 FB3 FB4: "3A ferrit bead", mouser code=875-HI1206N101R-10
IC1: library part ESP32-WROVER-E-N16R2, mouser code=356-ESP32WRVREN16R2
IC2: "Dual port ethernet switch with RMII", mouser code=998-KSZ8863RLL
IC4: library part LF50CDT, "5V Spannungsregler D-PAK", mouser code=511-LF50CDT-TR, sos electronic=40379
IC5: library part SN74AHCT245, "Octal Tristate Bus driver", mouser code=595-SN74AHCT245PWRE4
J1: "PSS 5pol wire-to-board-connector", reichelt code="PSS 254/5G"
J2: "PSS 6pol wire-to-board-connector", reichelt code="PSS 254/6G"
J3 J6: library part MTJ-88ARX1-FSM-PG-LH, "RJ45, shielded with LED", mouser code=737-MTJ88ARX1FSMPGLH
J4 J5 J7 J8: "Stiftleiste 2pol 2.54mm", reichelt code="SL 1X50G 2,54"
J9 J10: library part AKZ500/2, mouser code=845-34.102
J11: library part AKZ500/12, mouser code=845-34.112
J12 J13 J14 J15 J16 J17 J20: "PSS 3pol wire-to-board-connector", reichelt code="PSS 254/3G"
J18 J19 J23: "PSS 4pol wire-to-board-connector", reichelt code="PSS 254/4G"
J21 J22: "PSS 2pol wire-to-board-connector", reichelt code="PSS 254/2G"
Q1 Q2: "NPN switching Transistor, 3A", reichelt code="FMMT 617 TA"
Q3: library part BUK98180-100A, "N-FET 100V 4.6A logic level", mouser code=771-BUK98180-100ACUX
R1 R2 R3 R4 R5 R6 R9 R10 R11 R12 R14 R17 R18 R20 R21 R22 R23 R35 R36 R38 R49 R50 R51 R52 R57: Power rating=100mW, Tolerance=1%
  R1 R2 R3 R4 R5 R6 R9 R10 R11 R12 R21 R23 R38: reichelt code="SMD-0603 1K"
  R14 R17 R18 R22 R52: mouser code=603-RE0603FRE0710KL, reichelt code="SMD-0603 10K", storage=AIDTEKBox, storageID=4
  R57: mouser code=603-RE0603FRE072K7L, storage=AIDTEKBox, storageID=2
R7 R8 R13 R15 R16 R19 R53 R54 R55 R56: Power rating=100mW, mouser code=603-RE0603FRE074K7L, storage=AIDTEKBox, storageID=5
R24 R25 R26 R28 R29 R30 R31 R32 R33 R34 R37 R39 R40 R42 R43 R44 R45 R46 R47 R48: "51 100mW 0603", Power rating=100mW, Tolerance=1%
R27 R41: "75 100mW 0603", Power rating=100mW, Tolerance=1%
T1 T2: "Ethernet transformer", mouser code=530-S558-5999-U7-F
X1: library part ABM8-25.000MHZ-B2-T, "ABM8 25MHz crystal", mouser code=815-ABM8-25-B2-T
IC3: mouser code=595-TPS62933FDRLR
L1: mouser code=652-SRN5040-8R2M
L2 L3: mouser code=810-NLV32T-220J-EF

## Free pads (board coordinates)
  round 3.2 hole 3.2: 3(5,5) 3(5,75) 3(95,5) 3(95,75)

## Via types
v1: diameter 0.6, hole 0.3, Top Layer to Bottom Layer, 162 vias
v2: diameter 1, hole 0.5, Top Layer to Bottom Layer, 3 vias

## Nets (pads, with @x,y where several pads share a name; then routed paths per layer and width w, separated by ;. In a path a pad name is that pad's centre, name@x,y a point inside that pad or via, vN(x,y) a via of type N, cw(c..) or ccw(c..) an arc to the next point about the centre after c; other vN are vias at no path point)
5V: C40.1 C42.1 D3.2 D7.2 IC4.2 IC5.1 IC5.20 TP3.1 | length 71.1
  Top Layer w0.4: D7.2@20.6,33.9 30.1,33.9 TP3.1@30.2,33.8 IC4.2@30.2,31.65 31.55,31.65 32.4,30.8 C40.1@34.3,30.8 ; D3.2@35.345,27.2 34.4,27.2 34.3,27.3 C40.1@34.3,30.8 ; v1(37.4,32.6) 35.6,30.8 C40.1@34.3,30.8 ; v1(52.6,34.6) v1(52.6,39.2) ; v1(66,35.4) 67.525,35.4 C42.1@67.6,35.475 67.675,35.4 68.6,35.4 68.925,35.075 IC5.1@69.475,35.075 69.475,36.475 70,37 70,37.8 69.25,38.55 69.25,39.511 69.475,39.736 IC5.20@69.475,40.925
  Bottom Layer w0.4: v1(37.4,32.6) 44,39.2 v1(52.6,39.2) ; v1(52.6,34.6) 59.2,34.6 60,35.4 v1(66,35.4)
+1.8V: C10.+ C11.1 C12.1 FB1.1 IC2.32 IC2.42 TP1.1 | length 31.2
  Top Layer w0.2: C12.1@63.6,65.875 63.6,65.4 64.25,64.75 IC2.42@64.25,63.025 ; IC2.32@68.225,59.55 70.925,59.55 C11.1@71.075,59.4
  Top Layer w0.4: TP1.1@61,72.6 60.4,72 FB1.1@60.4,70.05 61.55,70.05 62.725,68.875 62.725,65.875 62.875,65.875 ; v1(62.4,65.4) 62.875,65.875 ; C12.1@63.6,65.875 62.875,65.875 ; v1(70,64.6) 70.1,64.7 C10.+@71.4,64.7 ; v1(71,60.6) 71.075,60.525 C11.1@71.075,59.4
  Bottom Layer w0.4: v1(62.4,65.4) 69.2,65.4 v1(70,64.6) 71,63.6 v1(71,60.6)
+1.8V_A: C13.+ C14.1 FB1.2 IC2.7 | length 20.8
  Top Layer w0.2: C14.1@54.6,57.875 55.675,57.875 56.35,58.55 57.331,58.55 57.531,58.35 58.069,58.35 58.269,58.55 IC2.7@59.775,58.55 60.95,58.55 61.4,59
  Top Layer w0.4: FB1.2@60.4,67.15 57.05,67.15 C13.+@57,67.1 60.2,63.9 60.2,62.6 61.4,61.4 61.4,59
+3.3V: C5.+ C6.1 C7.1 C28.+ C29.1 D1.1 FB2.2 IC2.22 IC2.40 J3.10 J3.12 J6.10 J6.12 R1.2 R3.2 R7.1 R8.1 R19.1 R22.2 | length 219.7
  Top Layer w0.2: v1(9.4,63) 9.4,61.2 11.2,59.4 v1(13.4,59.4) ; v1(10,43.6) 10,41.8 11.4,40.4 v1(13.8,40.4) ; J6.10@11.7,37.43 21.57,37.43 22.8,36.2 29.4,36.2 29.6,36 35.2,36 37.6,33.6 38.6,33.6 v1(40,32.2) ; v1(42.8,30.6) 43.7,29.7 ; R22.2@56.6,75.725 57.525,75.725 57.855,76.055 D1.1@58.6,76.055 59.145,76.055 v1(59.8,75.4) ; v1(61.2,78.2) 61.2,78.6 61.8,79.2 65.4,79.2 65.6,79 ; R8.1@63.6,71.275 63.8,71.075 v1(63.8,69.4) ; v1(65.2,61.4) 65.25,61.45 IC2.40@65.25,63.025 65.25,64.45 65.6,64.8 C6.1@65.6,65.875 65.925,66.2 66.075,66.2 R19.1@67.2,67.325 ; IC2.22@65.75,54.575 65.75,52.65 66,52.4 C7.1@66,51.725 66.475,51.725 67,51.2 67,48.8 66.8,48.6 v1(66.6,48.6) ; v1(66.8,68.4) R19.1@67.6,67.6 ; R19.1@67.6,67.325 R19.1@67.6,67.6 ; R1.2@69.6,78.325 69.6,79 69.4,79.2 65.8,79.2 65.6,79 ; 65.6,79 R3.2@65.6,78.325 66.275,78.325 66.6,78 66.6,72.275 R7.1@67.6,71.275 R19.1@67.6,67.6
  Top Layer w0.4: C5.+@69,52.5 v1(69,54.6)
  Top Layer w0.8: C29.1@31.525,9.6 32.25,10.325 FB2.2@32.25,12 C28.+@35,12 38,15 38,21.6 38.8,22.4 41,22.4 42.6,24 42.6,28.6 43.7,29.7 47.6,33.6 47.6,38.6 51.6,42.6 60.319,42.6 60.919,42 v1(64.8,42)
  Bottom Layer w0.2: v1(9.4,63) 9.4,65.76 J3.12@11.7,68.06 ; J6.10@11.7,37.43 13.43,37.43 14,38 14,40.4 v1(13.8,40.4) ; J6.12@11.7,48.86 13,47.56 13,46 10.6,43.6 v1(10,43.6) 9.6,44 9.6,54.53 J3.10@11.7,56.63 13.4,58.33 v1(13.4,59.4) ; v1(40,32.2) 41.2,32.2 v1(42.8,30.6) ; v1(59.8,75.4) 59.8,76 61.2,77.4 v1(61.2,78.2) ; v1(63.8,69.4) 64.8,68.4 v1(66.8,68.4) ; 65.6,48.6 v1(66.6,48.6)
  Bottom Layer w0.8: v1(64.8,42) 65,42.2 65,42.656 65.15,42.806 65.15,43.594 65.15,45.95 65.6,46.4 65.6,48.6 65.6,51.2 ; v1(65.2,61.4) 65.6,61 65.6,51.2 ; v1(69,54.6) 65.6,51.2
+3.3V_A: C8.+ C9.1 C20.+ C25.+ C31.+ C37.1 FB3.2 IC2.5 T1.2 T1.7 T2.2 T2.7 | length 97.5
  Top Layer w0.2: C9.1@52.8,59.6 52.8,60 53.4,60.6 55,60.6 55.95,59.65 58.5,59.65 58.6,59.55 IC2.5@59.775,59.55
  Top Layer w0.4: 37.6,39.8 38.575,38.825 T2.2@39.71,38.825 ; 37.6,45.2 37.625,45.175 T2.7@39.71,45.175 ; T1.2@39.71,63.025 37.625,63.025 37.6,63 ; T1.7@39.71,69.375 37.975,69.375 37.6,69 37.6,63 ; C9.1@52.8,59.325 52.8,59.6 52.3,60.1 C8.+@49.6,60.1 41.9,60.1 40.65,58.85 C20.+@40.65,57.2 38.4,57.2 37.6,58 37.6,63
  Top Layer w0.8: C37.1@29.6,19.125 30.125,19.65 FB3.2@31.8,19.65 34.95,19.65 C31.+@35,19.6 35,21.4 37.6,24 39.8,24 41.2,25.4 41.2,34.25 C25.+@41.05,34.4 38.6,34.4 37.6,35.4 37.6,39.8 37.6,45.2 37.6,52.2 40.65,55.25 C20.+@40.65,57.2
+3.3V_E: C1.1 C2.1 C38.+ C39.1 FB4.2 IC1.2 J2.1 J20.1 J23.1 R13.2 R14.2 R15.2 R16.2 R53.2 | length 166.4
  Top Layer w0.2: v1(78.4,36) 78.4,36.725 R53.2@79.275,37.6
  Top Layer w0.4: 38.7,7.9 38.6,8 38.6,13.2 44.8,19.4 R13.2@44.8,23.475 ; R14.2@69.8,18.325 70.925,18.325 v1(71,18.4) 72.461,18.4 73.191,19.13 80.93,19.13 81.4,19.6 81.4,24.15 J2.1@80,25.55 ; v1(73.65,74.05) 73.4,73.8 73.4,66.8 74.2,66 78,66 79,65 79,59.4 81.925,56.475 R16.2@81.925,55.8 R15.2@81.925,53.6 81.925,52.075 82.6,51.4 82.6,46.4 v1(82.4,46.2)
  Top Layer w0.8: C39.1@31.525,1.8 32.25,2.525 FB4.2@32.25,4.2 C38.+@35,4.2 38.7,7.9 40.2,9.4 43.6,9.4 45.8,7.2 50.4,7.2 52.84,9.64 63.8,9.64 ; v1(64,16.6) 63.8,16.4 63.8,9.64 ; C1.1@72.6,9.8 72.475,9.925 C2.1@69.6,9.925 67.725,9.925 67.44,9.64 IC1.2@65.95,9.64 63.8,9.64
  Bottom Layer w0.2: v1(78.4,36) J20.1@80,34.4
  Bottom Layer w0.4: v1(64,16.6) 67.2,16.6 68.2,17.6 70.2,17.6 v1(71,18.4) ; J23.1@73,77 73,74.7 v1(73.65,74.05) ; J2.1@80,25.55 81.6,27.15 81.6,30 81,30.6 78.8,30.6 78.4,31 78.4,32.8 J20.1@80,34.4 80,44.4 81.8,46.2 v1(82.4,46.2)
DTR: J1.4 Q2.2 R17.2 | length 17.3
  Top Layer w0.2: J1.4@73.8,15.38 72.58,15.38 71.75,14.55 71.75,12.45 73,11.2 74.739,11.2 75.539,12 76.4,12 77,11.4 77,10.2 75.6,8.8 R17.2@75.6,7.725 75.875,8 Q2.2@77.65,8
EN: BT2.3 BT2.4 C3.1 IC1.3 Q1.3 R14.1 | length 52.5
  Top Layer w0.2: IC1.3@65.95,10.91 67.71,10.91 68.2,11.4 68.2,14.4 68.475,14.675 C3.1@69.8,14.675 R14.1@69.8,16.875 70.075,16.6 v1(71.8,16.6) 76,16.6 77.4,15.2 77.4,13.095 81.295,9.2 84.2,9.2 84.6,8.8 Q1.3@84.6,6 ; v1(67.6,19.2) 67.6,19.6 70.6,22.6 ; BT2.4@70.192,26.35 70.192,24.607 v1(70.2,24.6) ; v1(70.2,23) 70.6,22.6 ; BT2.3@75.007,26.35 74.35,26.35 70.6,22.6
  Bottom Layer w0.2: v1(67.6,19.2) 67.75,19.05 71.269,19.05 71.8,18.519 v1(71.8,16.6) ; v1(70.2,23) v1(70.2,24.6)